# EAGLE board Motor Shield v2 (EAGLE 9.1.3)
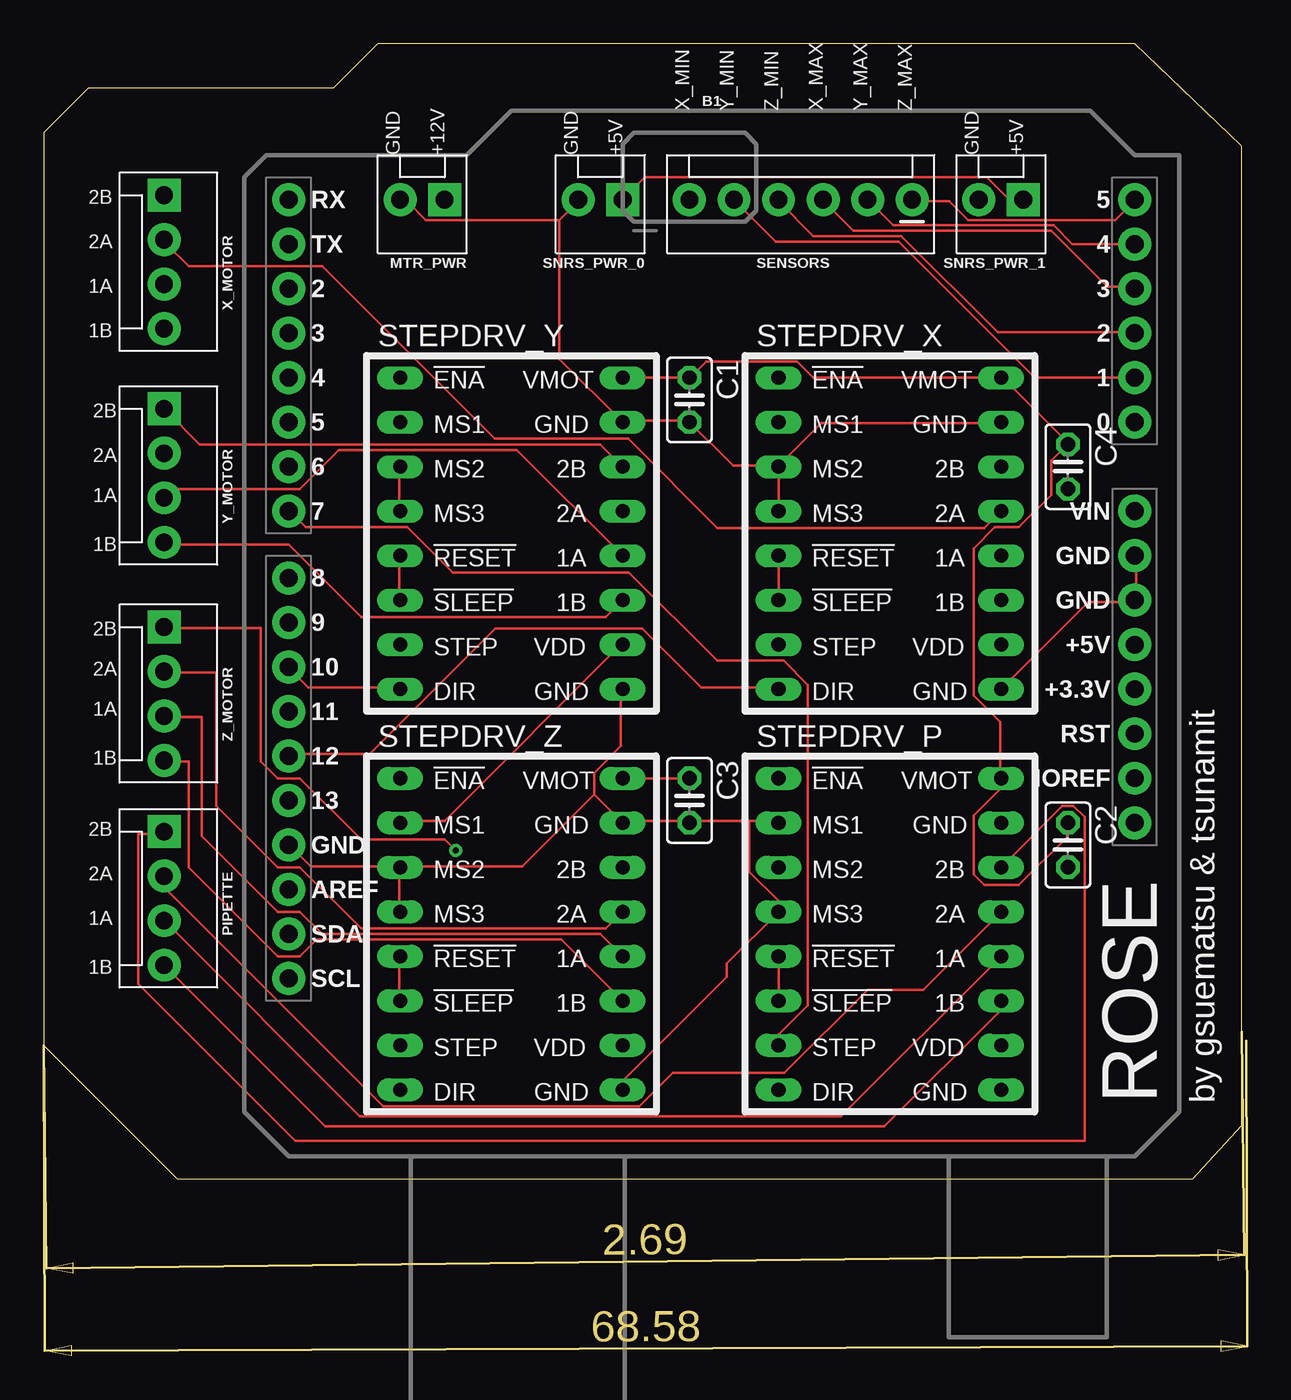
[diagram p0: board, top side]
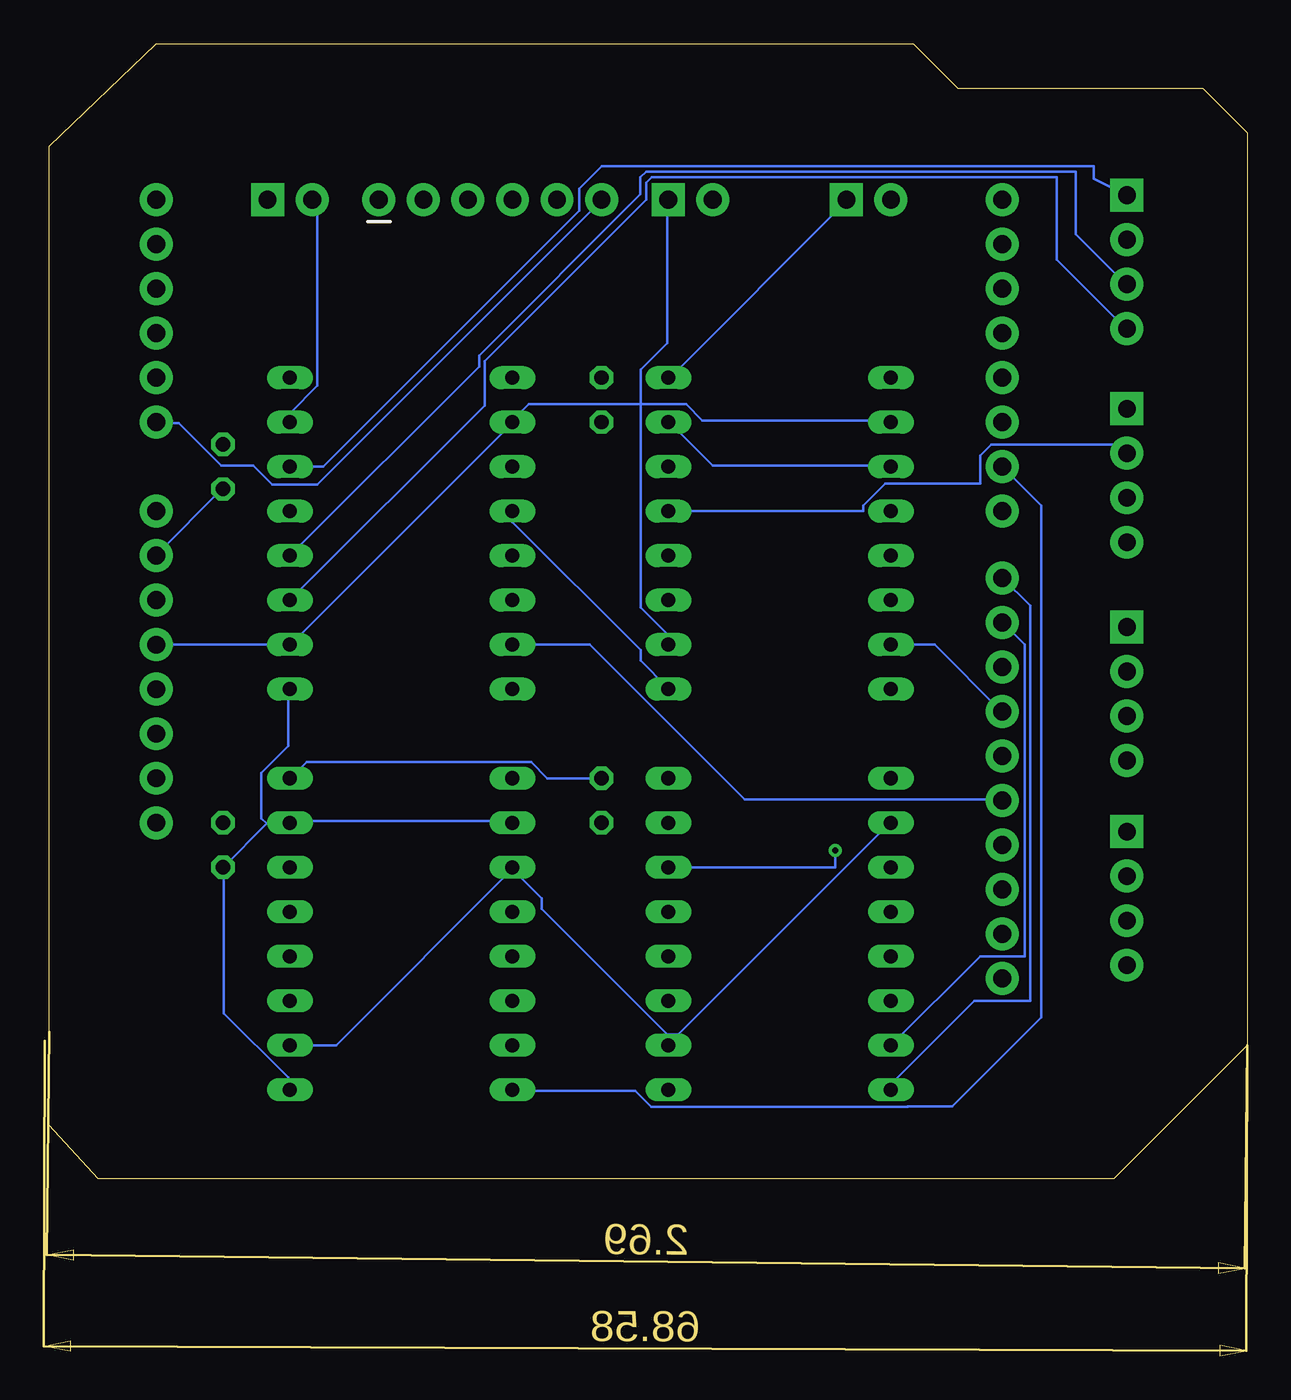
[diagram p1: board, bottom side, seen from below]

Size 68.33 x 64.77 mm. Coordinates in mm from the lower left corner, seen from the top.
Outline: 65.53,0 68.33,3.05 68.33,58.93 62.23,64.77 19.05,64.77 16.51,62.23 2.54,62.23 0,59.69 0,7.62 7.62,0 65.53,0
Copper layers (1*16): Top 0.035mm / dielectric 1.5mm / Bottom 0.035mm
Design rules "default": minimum track width 6mil, minimum drill 0.35mm, track to track 6mil, track to pad 6mil, pad to pad 6mil, via to via 6mil, smd to smd 6mil, copper to edge 40mil, drill to drill 6mil, minimum pad ring 10mil, minimum via ring 8mil, stop-mask expansion 4mil, vias tented up to drill 0mil, thermal gap 10mil

## Footprints (pad centres in the part's own frame; a part is rotated, then mirrored left to right if it is on the bottom)
UNO_R3_SHIELD = drill 1.016 pad 1.88: 3.3V 24.13,-2.54; 5V 24.13,0; A0 24.13,12.7; A1 24.13,15.24; A2 24.13,17.78; A3 24.13,20.32; A4 24.13,22.86; A5 24.13,25.4; AREF -24.13,-13.97; D2 -24.13,20.32; D3 -24.13,17.78; D4 -24.13,15.24; D5 -24.13,12.7; D6 -24.13,10.16; D7 -24.13,7.62; D8 -24.13,3.81; D9 -24.13,1.27; D10 -24.13,-1.27; D11 -24.13,-3.81; D12 -24.13,-6.35; D13 -24.13,-8.89; GND@0 24.13,2.54; GND@1 24.13,5.08; GND@2 -24.13,-11.43; IOREF 24.13,-7.62; NC 24.13,-10.16; RES 24.13,-5.08; RX -24.13,25.4; SCL -24.13,-19.05; SDA -24.13,-16.51; TX -24.13,22.86; VIN 24.13,7.62
C025-025X050 = drill 0.813 octagon: 1 -1.27,0; 2 1.27,0
MOLEX-1X2 = drill 1.016 pad 1.88 square: 1 0,0 | drill 1.016 pad 1.88: 2 2.54,0
MOLEX-1X4 = drill 1.016 pad 1.88 square: 1 0,0 | drill 1.016 pad 1.88: 2 2.54,0; 3 5.08,0; 4 7.62,0
MOLEX-1X6 = drill 1.016 pad 1.88: 1 0,0; 2 2.54,0; 3 5.08,0; 4 7.62,0; 5 10.16,0; 6 12.7,0
POLOLULU2128 = drill 0.8 long: 1 -7.62,7.62; 2 -7.62,5.08; 3 -7.62,2.54; 4 -7.62,0; 5 -7.62,-2.54; 6 -7.62,-5.08; 7 -7.62,-7.62; 8 -7.62,-10.16; 9 5.08,-10.16; 10 5.08,-7.62; 11 5.08,-5.08; 12 5.08,-2.54; 13 5.08,0; 14 5.08,2.54; 15 5.08,5.08; 16 5.08,7.62

## Placement (x,y rotation side)
B1  ARDUINO_UNO_R3_SHIELDBASIC  [UNO_R3_SHIELD]  38.1,30.48 0 top
C1  [C025-025X050]  36.83,44.45 270 top
C2  [C025-025X050]  58.42,19.05 270 top
C3  [C025-025X050]  36.83,21.59 270 top
C4  [C025-025X050]  58.42,40.64 270 top
MTR_PWR  [MOLEX-1X2]  22.86,55.88 180 top
PIPETTE  [MOLEX-1X4]  6.86,19.81 270 top
SENSORS  [MOLEX-1X6]  49.53,55.88 180 top
SNRS_PWR_0  [MOLEX-1X2]  33.02,55.88 180 top
SNRS_PWR_1  [MOLEX-1X2]  55.88,55.88 180 top
STEPDRV_P  [POLOLULU2128]  49.53,15.24 0 top
STEPDRV_X  [POLOLULU2128]  49.53,38.1 0 top
STEPDRV_Y  [POLOLULU2128]  27.94,38.1 0 top
STEPDRV_Z  [POLOLULU2128]  27.94,15.24 0 top
X_MOTOR  [MOLEX-1X4]  6.86,56.13 270 top
Y_MOTOR  [MOLEX-1X4]  6.86,43.94 270 top
Z_MOTOR  [MOLEX-1X4]  6.86,31.5 270 top

## Library data of the parts
B1 = SparkFun-Boards
C1-C4 = rcl; SPICEPREFIX: C
MTR_PWR SNRS_PWR_0 SNRS_PWR_1 = SparkFun-Connectors; SF_ID: PRT-09918
PIPETTE X_MOTOR Y_MOTOR Z_MOTOR = SparkFun-Connectors; PROD_ID: CONN-08186; SF_ID: PRT-08231
SENSORS = SparkFun-Connectors
STEPDRV_P STEPDRV_X STEPDRV_Y STEPDRV_Z = stepper_drivers_etc

## Nets
+5V: B1.5V SNRS_PWR_0.1 SNRS_PWR_1.1 STEPDRV_P.3 STEPDRV_P.10 STEPDRV_X.2 STEPDRV_X.10 STEPDRV_Y.2 STEPDRV_Y.10 STEPDRV_Z.2 STEPDRV_Z.10
+12V: C1.1 C2.1 C3.1 C4.1 MTR_PWR.1 STEPDRV_P.16 STEPDRV_X.16 STEPDRV_Y.16 STEPDRV_Z.16
GND: B1.GND@0 B1.GND@1 B1.GND@2 C1.2 C2.2 C3.2 C4.2 MTR_PWR.2 SNRS_PWR_0.2 SNRS_PWR_1.2 STEPDRV_P.2 STEPDRV_P.4 STEPDRV_P.9 STEPDRV_P.15 STEPDRV_X.3 STEPDRV_X.4 STEPDRV_X.9 STEPDRV_X.15 STEPDRV_Y.3 STEPDRV_Y.4 STEPDRV_Y.9 STEPDRV_Y.15 STEPDRV_Z.3 STEPDRV_Z.4 STEPDRV_Z.9 STEPDRV_Z.15
N$1: STEPDRV_X.5 STEPDRV_X.6
N$2: STEPDRV_Y.5 STEPDRV_Y.6
N$3: STEPDRV_Z.5 STEPDRV_Z.6
N$4: STEPDRV_P.5 STEPDRV_P.6
N$5: PIPETTE.1 STEPDRV_P.14
N$6: STEPDRV_X.13 X_MOTOR.2
N$7: STEPDRV_X.12 X_MOTOR.3
N$8: STEPDRV_X.11 X_MOTOR.4
N$9: PIPETTE.4 STEPDRV_P.11
N$11: PIPETTE.3 STEPDRV_P.12
N$13: STEPDRV_Z.11 Z_MOTOR.4
N$14: STEPDRV_Z.12 Z_MOTOR.3
N$15: STEPDRV_Z.13 Z_MOTOR.2
N$16: STEPDRV_Z.14 Z_MOTOR.1
N$17: STEPDRV_Y.11 Y_MOTOR.4
N$18: STEPDRV_Y.12 Y_MOTOR.3
N$19: B1.A2 SENSORS.4
N$20: STEPDRV_Y.14 Y_MOTOR.1
N$21: STEPDRV_Y.13 Y_MOTOR.2
N$22: B1.A0 SENSORS.6
N$23: B1.A1 SENSORS.5
N$24: B1.A3 SENSORS.3
N$25: B1.A4 SENSORS.2
N$26: B1.A5 SENSORS.1
N$27: B1.D11 STEPDRV_Y.7
N$28: B1.D12 STEPDRV_X.8
N$29: B1.D13 STEPDRV_X.7
N$30: B1.D10 STEPDRV_Y.8
N$31: B1.D9 STEPDRV_Z.7
N$32: B1.D8 STEPDRV_Z.8
N$33: B1.D7 STEPDRV_P.7
N$34: B1.D6 STEPDRV_P.8
N$36: STEPDRV_X.14 X_MOTOR.1
N$37: PIPETTE.2 STEPDRV_P.13

## Tracks (layer width: path | path; a pad name or v marks a point on that pad's centre or on a via)
+5V
  Top 0.152: STEPDRV_Z.2 20.42,20.42 22.86,20.42 32.92,30.48 STEPDRV_Y.10 | SNRS_PWR_0.1 34.29,57.15 53.8,57.15 55.02,55.93 55.78,55.93 SNRS_PWR_1.1
  Bottom 0.152: 33.07,8.23 33.07,7.62 STEPDRV_Z.10 33.07,8.23 | 33.07,8.23 40.23,15.39 40.23,16 41.91,17.68 | STEPDRV_P.10 51.97,7.62 41.91,17.68 | 41.91,17.68 STEPDRV_P.3 | B1.5V STEPDRV_X.10 54.56,30.48 41.91,43.13 STEPDRV_X.2 41.91,43.28 41,44.2 34.6,44.2 | 34.6,44.2 32,44.2 31.09,43.28 20.42,43.28 STEPDRV_Y.2 | 34.6,44.2 34.6,46.18 33.07,47.7 33.07,55.78 SNRS_PWR_0.1 | 34.6,44.2 34.6,32.61 33.07,31.09 33.07,30.48 STEPDRV_Y.10 | 33.07,8.23 32.46,8.23 20.42,20.27 STEPDRV_Z.2
+12V
  Top 0.152: C3.1 STEPDRV_Z.16 | 54.56,22.86 54.56,22.25 53.04,20.73 53.04,17.37 53.65,16.76 55.63,16.76 58.37,19.51 58.37,20.27 C2.1 | STEPDRV_Y.16 C1.1 36.88,45.72 37.8,46.63 42.98,46.63 43.89,45.72 STEPDRV_X.16 54.71,45.72 58.52,41.91 C4.1 58.37,41.91 57.46,41 57.46,39.01 55.63,37.19 54.25,37.19 53.04,35.97 53.04,27.58 54.56,26.06 54.56,22.86 | 54.56,22.86 STEPDRV_P.16
  Bottom 0.152: C3.1 39.93,22.86 40.84,23.77 53.65,23.77 54.56,22.86 STEPDRV_P.16 | MTR_PWR.1 22.86,55.78 32.92,45.72 STEPDRV_Y.16
GND
  Top 0.152: 29.41,54.71 21.79,54.71 20.73,55.78 20.42,55.78 MTR_PWR.2 | 29.41,54.71 30.48,55.78 SNRS_PWR_0.2 | STEPDRV_X.4 STEPDRV_X.3 41.91,40.69 | STEPDRV_Y.4 20.27,38.1 20.27,40.54 STEPDRV_Y.3 | 41.91,40.69 39.32,40.69 C1.2 36.73,43.28 33.07,43.28 STEPDRV_Y.15 29.41,46.79 29.41,54.71 | 41.91,40.69 44.35,43.13 54.56,43.13 STEPDRV_X.15 | B1.GND@1 62.33,35.51 62.33,33.07 B1.GND@0 62.18,32.92 59.59,32.92 STEPDRV_X.9 | STEPDRV_Z.9 33.07,5.18 33.07,5.64 38.96,11.53 38.96,12.29 STEPDRV_P.4 41.91,15.85 40.23,17.53 40.23,20.42 | STEPDRV_Z.4 20.27,15.24 20.27,17.68 STEPDRV_Z.3 | STEPDRV_Z.3 20.27,17.83 15.24,17.83 14.02,19.05 B1.GND@2 | 40.23,20.42 36.88,20.42 C3.2 36.73,20.42 33.07,20.42 STEPDRV_Z.15 31.39,21.95 | 40.23,20.42 41.91,20.42 STEPDRV_P.2 | 31.39,21.95 31.39,23.16 32.92,24.69 32.92,27.89 STEPDRV_Y.9 | 31.39,21.95 27.28,17.83 20.42,17.83 STEPDRV_Z.3
  Bottom 0.152: STEPDRV_X.15 54.56,43.28 54.56,43.74 53.04,45.26 53.04,55.47 53.34,55.78 SNRS_PWR_1.2 | STEPDRV_Y.3 20.42,40.69 30.48,40.69 32.92,43.13 STEPDRV_Y.15 | C4.2 58.52,39.32 62.18,35.66 B1.GND@1 | STEPDRV_P.9 54.71,5.18 54.71,5.79 58.37,9.45 58.37,17.68 C2.2 55.93,20.27 | 55.93,20.27 54.71,20.27 STEPDRV_P.15 54.56,20.42 41.91,20.42 STEPDRV_P.2 | 55.93,20.27 56.24,20.57 56.24,23.16 54.71,24.69 54.71,27.89 STEPDRV_X.9 | STEPDRV_X.4 41.91,37.49 34.6,30.17 34.6,29.57 33.07,28.04 STEPDRV_Y.9
N$1
  Top 0.152: STEPDRV_X.5 STEPDRV_X.6
N$2
  Top 0.152: STEPDRV_Y.6 20.27,33.07 20.27,35.51 STEPDRV_Y.5
N$3
  Top 0.152: STEPDRV_Z.6 20.27,10.21 20.27,12.65 STEPDRV_Z.5
N$4
  Top 0.152: STEPDRV_P.5 STEPDRV_P.6
N$5
  Top 0.152: 54.71,17.83 STEPDRV_P.14 58.1,21.27 58.74,21.27 59.37,20.64 59.37,2.16 14.35,2.16 5.4,11.11 5.4,19.69 6.67,19.69 PIPETTE.1
N$6
  Top 0.152: STEPDRV_X.13 53.66,37.15 38.42,37.15 33.34,42.23 25.72,42.23 15.88,52.07 8.25,52.07 6.99,53.34 X_MOTOR.2
N$7
  Bottom 0.152: STEPDRV_X.12 43.82,46.36 43.82,46.99 34.61,56.2 34.61,57.15 34.29,57.47 9.78,57.47 9.78,53.91 6.99,51.12 X_MOTOR.3
N$8
  Bottom 0.152: STEPDRV_X.11 43.5,44.13 43.5,46.67 34.29,55.88 34.29,56.83 33.97,57.15 10.86,57.15 10.86,52.45 6.99,48.58 X_MOTOR.4
N$9
  Top 0.152: 54.71,10.21 STEPDRV_P.11 54.61,9.65 47.94,2.98 16.07,2.98 PIPETTE.4
N$11
  Top 0.152: STEPDRV_P.12 45.47,3.56 18.03,3.56 PIPETTE.3
N$13
  Top 0.152: 32.92,10.06 STEPDRV_Z.11 29.53,13.65 15.56,13.65 14.61,12.7 13.33,12.7 8.25,17.78 8.25,23.81 6.99,23.81 Z_MOTOR.4
N$14
  Top 0.152: 32.92,12.8 STEPDRV_Z.12 31.75,13.97 15.88,13.97 14.61,15.24 13.33,15.24 9.02,19.56 9.02,26.35 6.99,26.35 Z_MOTOR.3
N$15
  Top 0.152: STEPDRV_Z.13 32.07,14.29 18.1,14.29 14.61,17.78 13.33,17.78 9.84,21.27 9.84,28.89 6.99,28.89 Z_MOTOR.2
N$16  (via drill 0.35)
  Top 0.152: v23.49,18.73 22.86,19.37 18.1,19.37 14.61,22.86 13.33,22.86 12.38,23.81 12.38,31.43 6.99,31.43 Z_MOTOR.1
  Bottom 0.152: 32.92,17.83 STEPDRV_Z.14 23.49,17.78 v23.49,18.73
N$17
  Top 0.152: STEPDRV_Y.11 32.07,32.07 18.1,32.07 13.97,36.2 6.99,36.2 Y_MOTOR.4
  Bottom 0.152: 32.92,33.07 STEPDRV_Y.11
N$18
  Top 0.152: 32.92,35.66 STEPDRV_Y.12 26.99,41.59 16.83,41.59 14.61,39.37 7.3,39.37 6.99,39.05 Y_MOTOR.3
N$19
  Top 0.152: B1.A2 62.18,48.31 54.41,48.31 48.92,53.8 43.89,53.8 41.91,55.78 SENSORS.4
N$20
  Top 0.152: 32.92,40.69 STEPDRV_Y.14 31.75,41.91 8.89,41.91 Y_MOTOR.1
N$21
  Bottom 0.152: STEPDRV_Y.13 21.91,38.1 21.91,38.42 20.64,39.69 15.24,39.69 15.24,41.28 14.61,41.91 6.99,41.91 6.99,41.59 Y_MOTOR.2
N$22
  Bottom 0.152: B1.A0 62.18,43.13 60.96,43.13 58.52,40.69 56.69,40.69 55.63,39.62 53.04,39.62 36.88,55.78 SENSORS.6
N$23
  Top 0.152: B1.A1 56.54,45.72 48.77,53.49 41.76,53.49 SENSORS.5
N$24
  Top 0.152: B1.A3 62.18,50.9 60.66,50.9 57.46,54.1 46.18,54.1 44.5,55.78 SENSORS.3
N$25
  Top 0.152: B1.A4 58.67,53.34 57.61,54.41 48.46,54.41 SENSORS.2
N$26
  Top 0.152: SENSORS.1 49.53,55.78 51.66,55.78 52.73,54.71 61.11,54.71 62.18,55.78 B1.A5
N$27
  Bottom 0.152: STEPDRV_Y.7 17.83,30.48 14.02,26.67 B1.D11
N$28
  Top 0.152: STEPDRV_X.8 41.91,28.04 37.49,28.04 34.14,31.39 25.76,31.39 18.59,24.23 14.02,24.23 B1.D12
N$29
  Bottom 0.152: STEPDRV_X.7 37.49,30.48 28.65,21.64 14.02,21.64 B1.D13
N$30
  Top 0.152: STEPDRV_Y.8 20.27,28.04 15.09,28.04 14.02,29.11 B1.D10
N$31
  Top 0.152: 13.87,31.7 B1.D9
  Bottom 0.152: STEPDRV_Z.7 15.24,12.7 12.7,12.7 12.7,30.48 B1.D9
N$32
  Bottom 0.152: 20.27,5.64 20.27,5.18 STEPDRV_Z.8 20.32,5.4 15.56,10.16 12.38,10.16 12.38,32.7 B1.D8
N$33
  Top 0.152: STEPDRV_P.7 41.91,8.23 43.59,9.91 43.59,28.19 42.22,29.57 38.41,29.57 33.38,34.59 23.32,34.59 20.73,37.19 14.93,37.19 14.02,38.1 B1.D7
N$34
  Bottom 0.152: 19.36,4.12 19.37,4.12 | 19.37,4.12 33.98,4.12 34.9,5.03 41.91,5.03 STEPDRV_P.8 | B1.D6 11.75,38.42 11.75,9.21 16.83,4.13 19.37,4.13 19.37,4.12
N$36
  Bottom 0.152: STEPDRV_X.14 52.71,40.64 38.1,55.25 38.1,56.52 36.83,57.78 8.76,57.78 8.76,57.09 X_MOTOR.1
N$37
  Top 0.152: STEPDRV_P.13 50.16,10.8 46.99,10.8 42.23,6.03 35.88,6.03 33.97,4.13 19.37,4.13 6.99,16.51 6.99,17.15 PIPETTE.2

## Text on the board
tNames: X_MIN | Y_MIN | Z_MIN | X_MAX | Y_MAX | Z_MAX | GND | +12V | GND | +5V | GND | +5V | 2B | 2A | 1A | 1B | 2B | 2A | 1A | 1B | 2B | 2A | 1A | 1B | 2B | 2A | 1A | 1B | ROSE | by gsuematsu & tsunamit